# EAGLE board u prog with esp12 (EAGLE 9.6.1)

Size 58.4 x 97.46 mm. Coordinates in mm from the lower left corner, seen from the top.
Outline: 0,0 58.4,0 58.4,97.46 0,97.46 0,0
Copper layers (1*16): Top 0.035mm / dielectric 1.5mm / Bottom 0.035mm
Design rules "default": minimum track width 6mil, minimum drill 0.35mm, track to track 6mil, track to pad 6mil, pad to pad 6mil, via to via 6mil, smd to smd 6mil, copper to edge 40mil, drill to drill 6mil, minimum pad ring 10mil, minimum via ring 8mil, stop-mask expansion 4mil, vias tented up to drill 0mil, thermal gap 10mil

## Footprints (pad centres in the part's own frame; a part is rotated, then mirrored left to right if it is on the bottom)
LED5MM = drill 0.813 octagon: A -1.27,0; K 1.27,0
C0805 = smd 1.3 x 1.5: 1 -0.95,0; 2 0.95,0
C/6032-28R = smd 2.55 x 2.5: + 2.525,0; - -2.525,0
SOD80C = smd 1.4 x 1.8: A 1.7,0; C -1.7,0
AB9V = drill 1.118 pad 3.15 octagon: + 0,2.54; - 0,-2.54
TQFP32-08 = smd 1.27 x 0.559: 1 -4.293,2.8; 2 -4.293,2; 3 -4.293,1.2; 4 -4.293,0.4; 5 -4.293,-0.4; 6 -4.293,-1.2; 7 -4.293,-2; 8 -4.293,-2.8; 17 4.293,-2.8; 18 4.293,-2; 19 4.293,-1.2; 20 4.293,-0.4; 21 4.293,0.4; 22 4.293,1.2; 23 4.293,2; 24 4.293,2.8 | smd 0.559 x 1.27: 9 -2.8,-4.293; 10 -2,-4.293; 11 -1.2,-4.293; 12 -0.4,-4.293; 13 0.4,-4.293; 14 1.2,-4.293; 15 2,-4.293; 16 2.8,-4.293; 25 2.8,4.293; 26 2,4.293; 27 1.2,4.293; 28 0.4,4.293; 29 -0.4,4.293; 30 -1.2,4.293; 31 -2,4.293; 32 -2.8,4.293
AVR-ISP-6PIN = drill 1.016 octagon: GND 1.27,-2.54; MOSI 1.27,0; RESET -1.27,-2.54; SCK -1.27,0; VCC 1.27,2.54 | drill 1.016: MISO -1.27,2.54
1X08 = drill 1.016 long: 1 -8.89,0; 2 -6.35,0; 3 -3.81,0; 4 -1.27,0; 5 1.27,0; 6 3.81,0; 7 6.35,0; 8 8.89,0
JP2Q = drill 0.914 octagon: 1 -1.27,-1.27; 2 -1.27,1.27; 3 1.27,-1.27; 4 1.27,1.27
DUOLED-C-5MM = drill 0.813 long: AR 2.54,0; AX -2.54,0; C 0,0
CSM-7X-DU = smd 5.5 x 2: 1 -4.75,0; 2 4.75,0
SOT23 = smd 1 x 1.4: 1 -0.95,-1.1; 2 0.95,-1.1; 3 0,1.1
R0805 = smd 1.3 x 1.5: 1 -0.95,0; 2 0.95,0
B3F-10XX-SMD = smd 2.54 x 1.27: P$1 -3.467,2.311; P$2 3.467,2.311; P$3 3.467,-2.311; P$4 -3.467,-2.311
TL4XPO = drill 1.1 pad 1.676: 1 -2.54,2.54; 2 0,2.54; 3 2.54,2.54; 4 -2.54,-2.54; 5 0,-2.54; 6 2.54,-2.54
TF-PULL = smd 0.7 x 1.4: 1 -2.2,-7.62; 2 -1.1,-7.62; 3 0,-7.62; 4 1.1,-7.62; 5 2.2,-7.62; 6 3.3,-7.62; 7 4.4,-7.62; 8 5.5,-7.62; 9 6.6,-7.62 | smd 1.4 x 2: S1 -7.9,2.85; S2 7.9,2.85 | smd 1.28 x 1.4: S3 7.96,-6.75 | smd 1.95 x 1.4: S4 -7.025,-6.75 | hole 1.25: -3.1,3.25; 4.9,3.25
MA03-2 = drill 1.016: 1 -2.54,-1.27 | drill 1.016 octagon: 2 -2.54,1.27; 3 0,-1.27; 4 0,1.27; 5 2.54,-1.27; 6 2.54,1.27
XCVR_ESP8266-12E/ESP-12E = smd 2 x 1.2: 1 -7.5,7; 2 -7.5,5; 3 -7.5,3; 4 -7.5,1; 5 -7.5,-1; 6 -7.5,-3; 7 -7.5,-5; 8 -7.5,-7; 15 7.5,-7; 16 7.5,-5; 17 7.5,-3; 18 7.5,-1; 19 7.5,1; 20 7.5,3; 21 7.5,5; 22 7.5,7 | smd 1.1 x 1.7: 9 -5,-8.5; 10 -3,-8.5; 11 -1,-8.5; 12 1,-8.5; 13 3,-8.5; 14 5,-8.5
SOT229P700X180-4N = smd 0.93 x 1.31: 1 -2.29,-3.345; 2 0,-3.345; 3 2.29,-3.345 | smd 3.24 x 1.31: 4 0,3.345
228-4817-00-0602J = drill 0.9 long: 1 -16.51,-5.08; 2 -13.97,-5.08; 3 -11.43,-5.08; 4 -8.89,-5.08; 5 -6.35,-5.08; 6 -3.81,-5.08; 7 -1.27,-5.08; 8 1.27,-5.08; 9 3.81,-5.08; 10 6.35,-5.08; 11 8.89,-5.08; 12 11.43,-5.08; 13 13.97,-5.08; 14 16.51,-5.08; 15 16.51,5.08; 16 13.97,5.08; 17 11.43,5.08; 18 8.89,5.08; 19 6.35,5.08; 20 3.81,5.08; 21 1.27,5.08; 22 -1.27,5.08; 23 -3.81,5.08; 24 -6.35,5.08; 25 -8.89,5.08; 26 -11.43,5.08; 27 -13.97,5.08; 28 -16.51,5.08 | hole 2: 21.24,0; -24.74,0

## Placement (x,y rotation side)
BLE_PROG  yellow  [LED5MM]  2.54,41.91 90 top
C1  100nF  [C0805]  45.72,39.37 0 bottom
C4  100nF  [C0805]  39.37,39.37 0 bottom
C5  10uF  [C/6032-28R]  33.02,77.47 90 bottom
C6  0.47uF  [C/6032-28R]  7.62,74.93 0 top
C7  10uF  [C/6032-28R]  17.78,16.51 0 bottom
C8  22pf  [C0805]  8.89,62.23 0 bottom
C9  22pf  [C0805]  16.51,62.23 0 bottom
D1  3V3  [SOD80C]  38.1,73.66 90 bottom
G1  AB9V  [AB9V]  3.81,13.97 0 top
IC1  MEGA328P  [TQFP32-08]  50.8,69.85 0 bottom
J1  AVR-ISP-6PINAVR-ISP-6PIN  [AVR-ISP-6PIN]  54.61,7.62 0 top
JP1  8 pin  [1X08]  30.48,66.04 0 top
JP3  a1  [JP2Q]  3.81,3.81 0 top
LD1  Bicolor led  [DUOLED-C-5MM]  2.54,59.69 90 top
Q1  CSM-7X-DU  [CSM-7X-DU]  11.43,67.31 180 bottom
Q2  3904  [SOT23]  29.21,92.71 0 top
Q3  3904  [SOT23]  35.56,92.71 0 top
Q4  3904  [SOT23]  45.72,91.44 0 top
R1  330  [R0805]  34.29,39.37 0 bottom
R2  1K  [R0805]  29.21,39.37 0 bottom
R3  22  [R0805]  24.13,39.37 0 bottom
R4  22  [R0805]  19.05,39.37 0 bottom
R5  1K  [R0805]  13.97,39.37 0 bottom
R6  470K  [R0805]  24.13,85.09 0 top
R7  10K  [R0805]  24.13,74.93 0 top
R8  100K  [R0805]  29.21,80.01 0 top
R9  1K  [R0805]  19.05,73.66 0 top
R10  1K  [R0805]  54.61,49.53 0 bottom
R11  150K  [R0805]  15.24,88.9 0 top
R12  10K  [R0805]  15.24,82.55 0 top
R13  1K  [R0805]  8.89,2.54 0 bottom
R14  1K  [R0805]  17.78,11.43 0 bottom
R15  1K  [R0805]  17.78,3.81 0 bottom
R16  0Ohm  [R0805]  16.51,21.59 0 bottom
R17  SELF PROG 0E  [R0805]  36.83,2.54 180 top
S1  [B3F-10XX-SMD]  19.05,21.59 0 top
S2  [B3F-10XX-SMD]  30.48,12.7 0 top
S3  [B3F-10XX-SMD]  30.48,30.48 0 top
S4  [B3F-10XX-SMD]  41.91,21.59 0 top
S5  [B3F-10XX-SMD]  30.48,21.59 0 top
S6  TL46PO  [TL4XPO]  5.08,30.48 270 top
S7  TL46PO  [TL4XPO]  53.34,30.48 270 top
SD1  TF-HOLDER  [TF-PULL]  52.07,87.63 90 bottom
SV2  [MA03-2]  44.45,3.81 0 top
U1  ESP8266-12E/ESP-12E  [XCVR_ESP8266-12E/ESP-12E]  19.05,86.36 270 bottom
U2  AMS1117-3.3  [SOT229P700X180-4N]  35.56,91.44 270 bottom
WIFI  blue  [LED5MM]  2.54,50.8 90 top
ZX1  228-4817-00-0602J  [228-4817-00-0602J]  30.48,50.8 180 top

## Library data of the parts
BLE_PROG LD1 WIFI = led
C1 C4-C9 = rcl
D1 = diode
G1 = battery
IC1 = avr-6
J1 = avr-isp
JP1 = pinhead
JP3 = jumper
Q1 = crystal; OC_FARNELL: unknown; OC_NEWARK: unknown
Q2-Q4 = semicon-smd-ipc
R1-R17 = rcl; SPICEPREFIX: R
S1-S5 = switch-omron
S6 S7 = switch
SD1 = sd-mmc
SV2 = con-lstb; OC_FARNELL: unknown; OC_NEWARK: unknown
U1 = ESP8266-12E_ESP-12E; AVAILABILITY: Not in stock; DESCRIPTION: This WiFi module has a 32-bit MCU micro and clock speeds supporting 80 MHz or 160 MHz. Supports the RTOS and integrated Wi-Fi MAC/BB/RF/PA/LNA, and has an on-board antenna.; MF: AI-Thinker; MP: ESP8266-12E/ESP-12E; PACKAGE: None; PRICE: None
U2 = AMS1117-3.3; AVAILABILITY: In Stock; DESCRIPTION: Sot223/Pkg 1-Amp 3.3-Volt Low Drop Out Voltage Regulatator; MF: Advanced Monolithic Systems; MP: AMS1117-3.3; PACKAGE: SOT-223 Seeed Technology; PRICE: None
ZX1 = con-3m; MF: 3M; MPN: 228-4817-00-0602J; OC_FARNELL: 1252775; OC_NEWARK: 85K7834

## Nets
+3V3: C1.1 IC1.4 IC1.6 IC1.18 IC1.20 JP3.4 LD1.AR R9.1 R12.2 S7.3
GND: C1.2 C4.2 C5.- C6.- C7.- C8.1 C9.2 D1.A G1.- IC1.3 IC1.5 IC1.21 J1.GND JP1.8 JP3.2 Q2.2 Q3.2 Q4.2 R5.2 R6.1 S1.P$3 S1.P$4 S2.P$3 S2.P$4 S3.P$3 S3.P$4 S4.P$3 S4.P$4 S6.5 S7.4 S7.6 SD1.6 SD1.S1 SD1.S2 SD1.S3 SD1.S4 SV2.6 U1.15 U2.1 WIFI.K ZX1.8 ZX1.22
LCD-VCC: C4.1 IC1.8 JP1.6
MOSI: IC1.15 R4.1
N$1: IC1.17 R3.1
N$2: IC1.12 R2.1
N$3: D1.C IC1.16 R1.1
N$4: IC1.9 JP1.3
N$5: J1.MISO R1.2 SV2.1 ZX1.18
N$6: J1.SCK R3.2 SV2.3 ZX1.19
N$7: LD1.C R5.1
N$8: G1.+ S6.2
N$9: IC1.30 SD1.7 U1.7
N$10: C8.2 Q1.1 ZX1.9
N$11: IC1.11 JP1.1
N$12: IC1.10 JP1.2
N$13: IC1.31 JP1.4 SD1.3 U1.6
N$14: C9.1 Q1.2 ZX1.10
N$15: Q2.3 Q3.1 R8.2 R12.1
N$16: Q3.3 R7.1 R9.2 R11.2
N$17: IC1.29 R17.2
N$18: J1.VCC R2.2 SV2.2 ZX1.7 ZX1.20
N$19: Q2.1 R6.2 R11.1 S5.P$3 S5.P$4
N$21: J1.MOSI R4.2 SV2.4 ZX1.17
N$22: IC1.28 S4.P$2
N$23: IC1.27 S3.P$2
N$24: IC1.26 S2.P$2
N$25: IC1.25 S1.P$2
N$26: LD1.AX ZX1.15
N$27: C6.+ R8.1 S5.P$1 S5.P$2
N$28: Q4.1 R7.2
N$30: JP1.7 Q4.3
N$31: IC1.7 SD1.2 U1.17
N$32: BLE_PROG.A R13.1
N$33: S6.6 S7.5
N$34: S6.3 S7.2
N$35: R10.2 WIFI.A
N$36: R10.1 S7.1 U2.3
N$37: BLE_PROG.K JP3.1
N$38: JP3.3 R13.2
N$39: R14.1 U1.1
N$40: R15.1 U1.3
N$41: C7.+ R14.2 R15.2 R16.2 U1.8 U2.2
RST: IC1.24 J1.RESET R17.1 SV2.5 ZX1.1
SCK2: IC1.2 JP1.5 SD1.5 U1.5
SD-VCC: C5.+ IC1.1 IC1.23 IC1.32 R16.1 SD1.4

## Tracks (layer width: path | path; a pad name or v marks a point on that pad's centre or on a via)
+3V3  (9 unrouted)
GND  (41 unrouted)
LCD-VCC  (2 unrouted)
MOSI  (1 unrouted)
N$1  (1 unrouted)
N$2  (1 unrouted)
N$3  (2 unrouted)
N$4  (1 unrouted)
N$5  (3 unrouted)
N$6  (3 unrouted)
N$7  (1 unrouted)
N$8  (1 unrouted)
N$9  (2 unrouted)
N$10  (2 unrouted)
N$11  (1 unrouted)
N$12  (1 unrouted)
N$13  (3 unrouted)
N$14  (2 unrouted)
N$15  (3 unrouted)
N$16  (3 unrouted)
N$17  (1 unrouted)
N$18  (4 unrouted)
N$19  (4 unrouted)
N$21  (3 unrouted)
N$22  (1 unrouted)
N$23  (1 unrouted)
N$24  (1 unrouted)
N$25  (1 unrouted)
N$26  (1 unrouted)
N$27  (3 unrouted)
N$28  (1 unrouted)
N$30  (1 unrouted)
N$31  (2 unrouted)
N$32  (1 unrouted)
N$33  (1 unrouted)
N$34  (1 unrouted)
N$35  (1 unrouted)
N$36  (2 unrouted)
N$37  (1 unrouted)
N$38  (1 unrouted)
N$39  (1 unrouted)
N$40  (1 unrouted)
N$41  (5 unrouted)
RST  (4 unrouted)
SCK2  (3 unrouted)
SD-VCC  (5 unrouted)
(copper drawn outside any net)
  shapes: Top area x2